# EAGLE board SONAR_4UP (EAGLE 9.5.0)
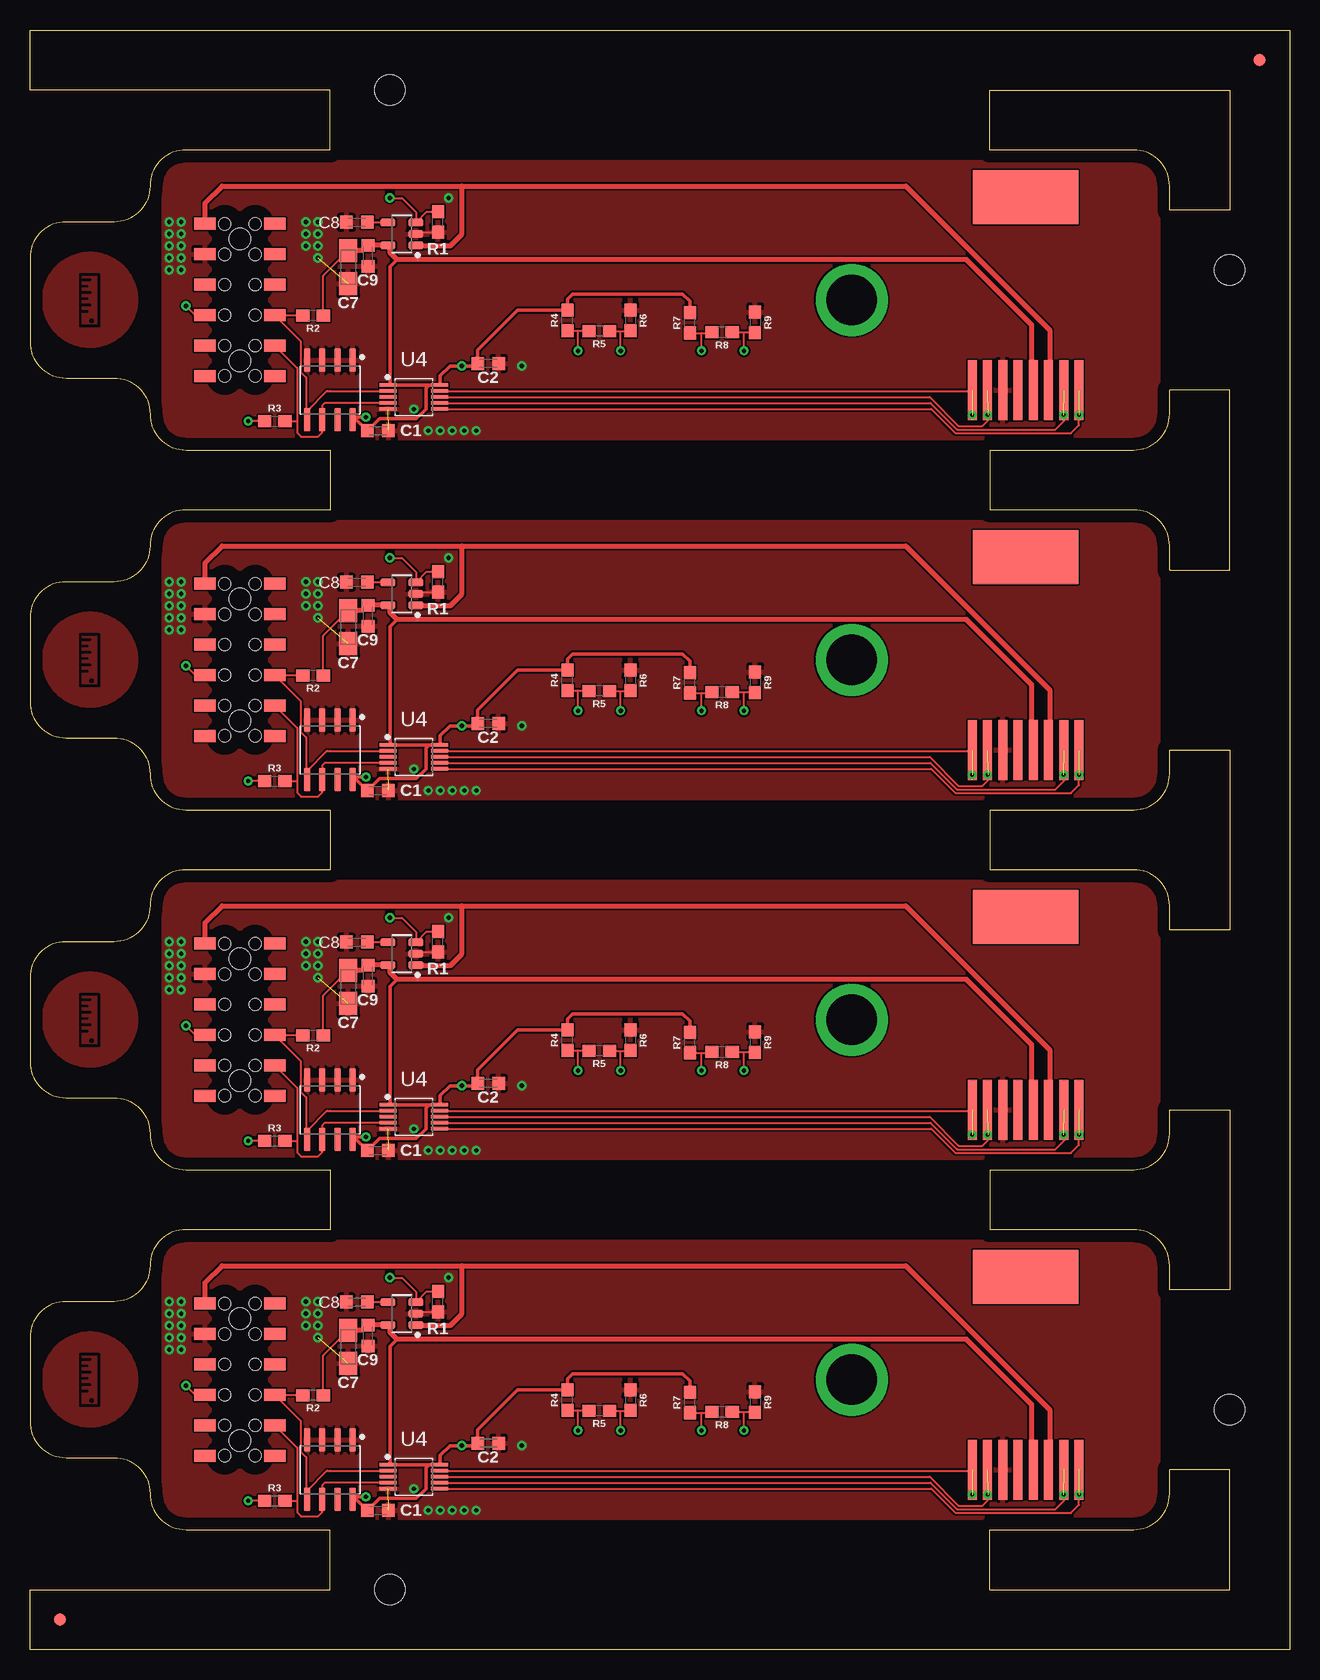
[diagram p0: board, top side]
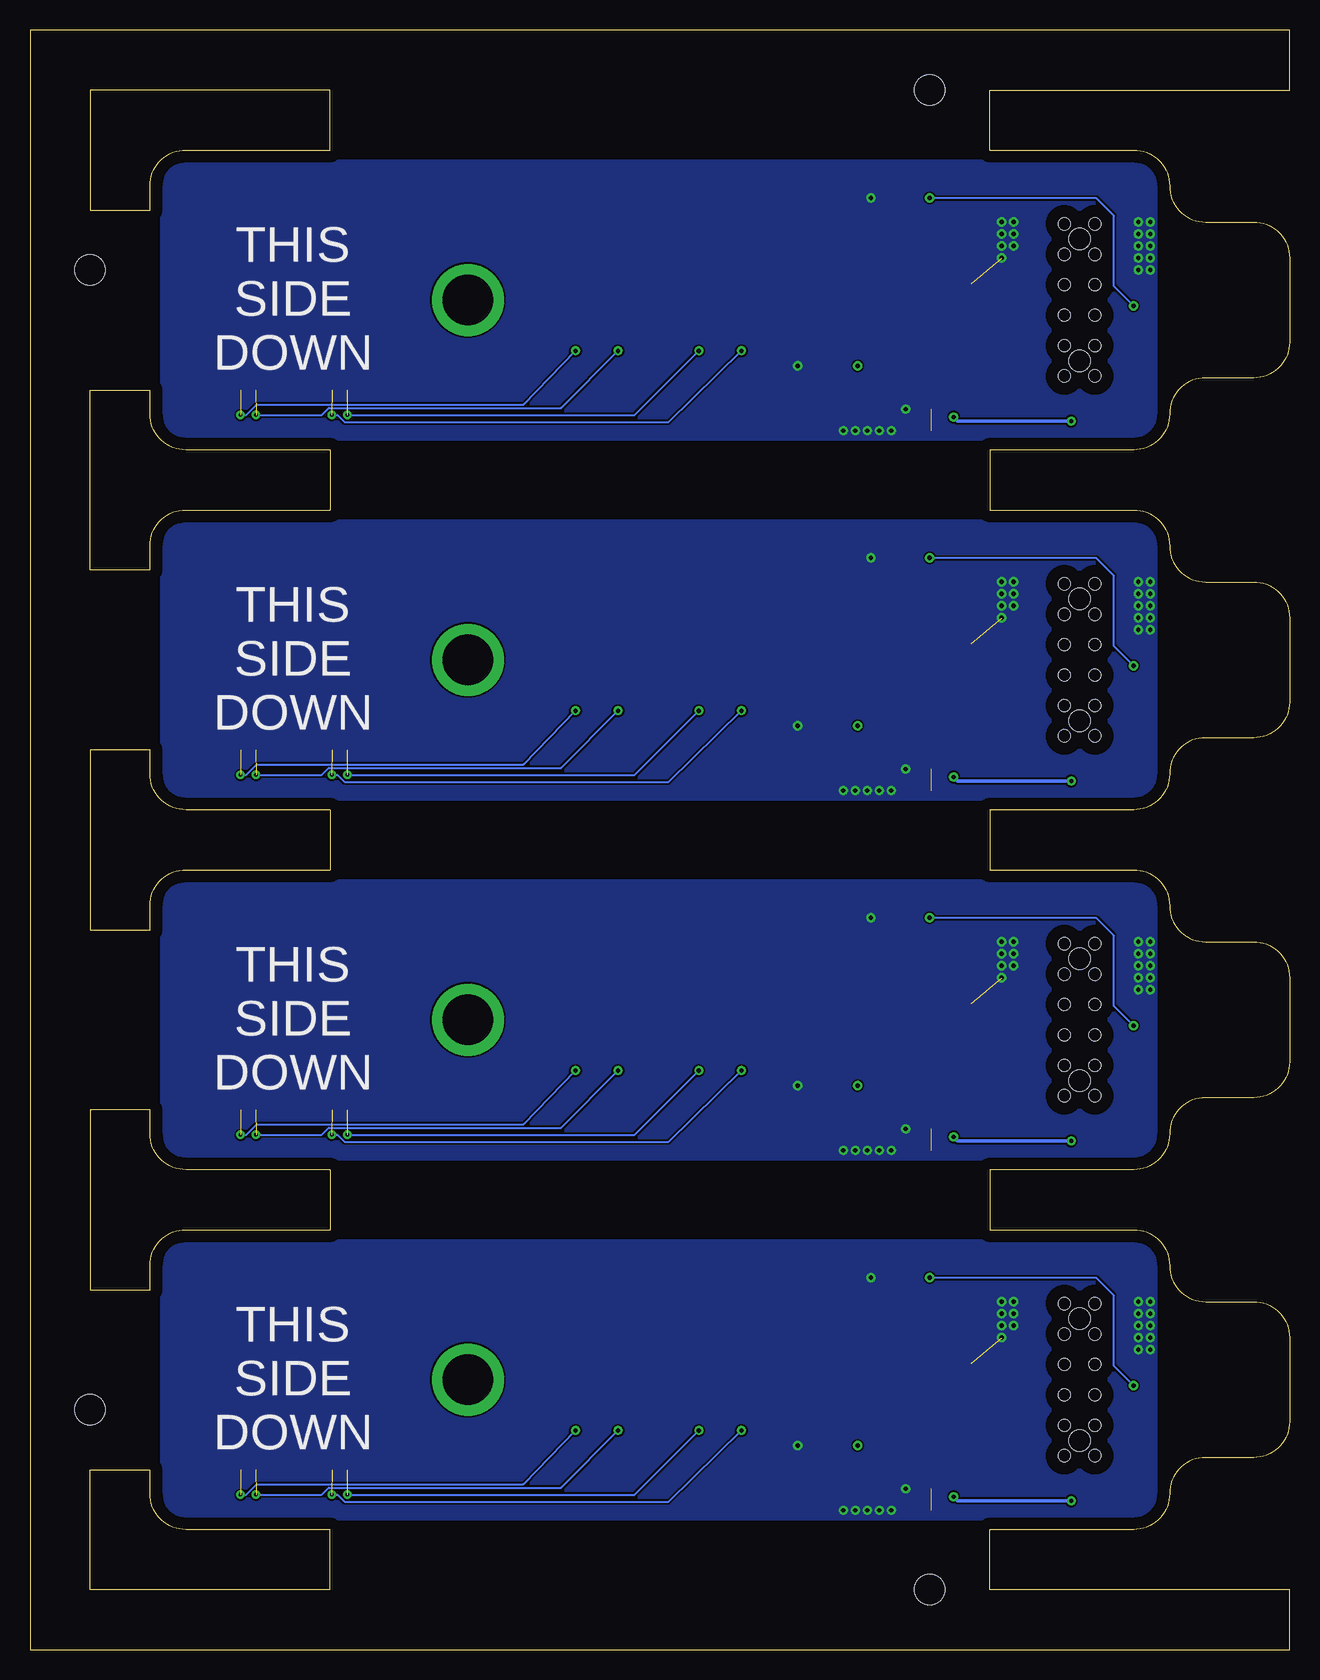
[diagram p1: board, bottom side, seen from below]

Size 105 x 135 mm. Coordinates in mm from the lower left corner, seen from the top.
Outline: 92,10 arc90 95,13 95,15 100,15 100,5 80,5 80,10 92,10
Outline: 95,32 arc90 92,35 80,35 80,40 92,40 arc90 95,43 95,45 100,45 100,30 95,30 95,32
Outline: 10,13 arc90 13,10 25,10 25,5 0,5 0,0 105,0 105,135 0,135 0,130 25,130 25,125 13,125 arc90 10,122 arc-90 7,119 3,119 arc90 0,116 0,109 arc90 3,106 7,106 arc-90 10,103 arc90 13,100 25,100 25,95 13,95 arc90 10,92 arc-90 7,89 3,89 arc90 0,86 0,79 arc90 3,76 7,76 arc-90 10,73 arc90 13,70 25,70 25,65 13,65 arc90 10,62 arc-90 7,59 3,59 arc90 0,56 0,49 arc90 3,46 7,46 arc-90 10,43 arc90 13,40 25,40 25,35 13,35 arc90 10,32 arc-90 7,29 3,29 arc90 0,26 0,19 arc90 3,16 7,16 arc-90 10,13
Outline: 95,62 arc90 92,65 80,65 80,70 92,70 arc90 95,73 95,75 100,75 100,60 95,60 95,62
Outline: 95,92 arc90 92,95 80,95 80,100 92,100 arc90 95,103 95,105 100,105 100,90 95,90 95,92
Outline: 95,122 arc90 92,125 80,125 80,130 100,130 100,120 95,120 95,122
Copper layers (1*16): Top 0.035mm / dielectric 1.5mm / Bottom 0.035mm
Design rules "default *": minimum track width 6mil, minimum drill 0.35mm, track to track 6mil, track to pad 6mil, pad to pad 6mil, via to via 6mil, smd to smd 6mil, copper to edge 40mil, drill to drill 6mil, minimum pad ring 10mil, minimum via ring 8mil, stop-mask expansion 4mil, vias tented up to drill 0.35mm, thermal gap 10mil
Holes 2.54 mm at 30,5 100,20 100,115 30,130

## Footprints (pad centres in the part's own frame; a part is rotated, then mirrored left to right if it is on the bottom)
C0603K = smd 1.05 x 1.08: 1 -0.875,0; 2 0.875,0
A/3216-18R = smd 1.95 x 1.5: + 1.375,0; - -1.375,0
FIDUCIAL_1MM = smd 1 x 1: 1 0,0
M20-7810645 = smd 1.02 x 1.78: P$1 -6.35,-2.91; P$2 -3.81,-2.91; P$3 -1.27,-2.91; P$4 1.27,-2.91; P$5 3.81,-2.91; P$6 6.35,-2.91; P$7 6.35,2.91; P$8 3.81,2.91; P$9 1.27,2.91; P$10 -1.27,2.91; P$11 -3.81,2.91; P$12 -6.35,2.91 | hole 1.02: -6.35,1.27; -3.81,1.27; -1.27,1.27; 1.27,1.27; 3.81,1.27; 6.35,1.27; 6.35,-1.27; 3.81,-1.27; 1.27,-1.27; -1.27,-1.27; -3.81,-1.27; -6.35,-1.27 | hole 1.8: -5.08,0; 5.08,0
85513-5009 = smd 0.76 x 5: 1 4.445,0; 2 3.175,0; 3 1.905,0; 4 0.635,0; 5 -0.635,0; 6 -1.905,0; 7 -3.175,0; 8 -4.445,0 | smd 8.8 x 4.5: P$1 0,16.05
0603 = smd 1.1 x 1: 1 -0.85,0; 2 0.85,0
SOIC127P600X175-8 = smd 1.968 x 0.569: 1 -2.473,1.905; 2 -2.473,0.635; 3 -2.473,-0.635; 4 -2.473,-1.905; 5 2.473,-1.905; 6 2.473,-0.635; 7 2.473,0.635; 8 2.473,1.905
SOP50P490X110-10 = smd 1.438 x 0.297: 1 -2.145,1; 2 -2.145,0.5; 3 -2.145,0; 4 -2.145,-0.5; 5 -2.145,-1; 6 2.145,-1; 7 2.145,-0.5; 8 2.145,0; 9 2.145,0.5; 10 2.145,1
SOT95P280X145-5 = smd 1.262 x 0.609: 1 -1.175,0.95; 2 -1.175,0; 3 -1.175,-0.95; 4 1.175,-0.95; 5 1.175,0.95

## Placement (x,y rotation side)
C1  .1uf  [C0603K]  29,101.6 0 top
C2  .1uf  [C0603K]  38.2,107.2 0 top
C3  6.8uf  [A/3216-18R]  26.54,85.23 90 top
C4  [C0603K]  27.25,88.97 180 top
C5  .1uf  [C0603K]  28.17,86.17 270 top
C6  .1uf  [C0603K]  29,71.6 0 top
C7  6.8uf  [A/3216-18R]  26.54,115.23 90 top
C8  [C0603K]  27.25,118.97 180 top
C9  .1uf  [C0603K]  28.17,116.17 270 top
C10  .1uf  [C0603K]  38.2,77.2 0 top
C11  6.8uf  [A/3216-18R]  26.54,55.23 90 top
C12  [C0603K]  27.25,58.97 180 top
C13  .1uf  [C0603K]  28.17,56.17 270 top
C14  .1uf  [C0603K]  29,41.6 0 top
C15  .1uf  [C0603K]  38.2,47.2 0 top
C16  6.8uf  [A/3216-18R]  26.54,25.23 90 top
C17  [C0603K]  27.25,28.97 180 top
C18  .1uf  [C0603K]  28.17,26.18 270 top
C19  .1uf  [C0603K]  29,11.6 0 top
C20  .1uf  [C0603K]  38.2,17.2 0 top
FID1  FIDUCIAL_1MM  [FIDUCIAL_1MM]  102.5,132.5 0 top
FID13  FIDUCIAL_1MM  [FIDUCIAL_1MM]  2.5,2.5 0 top
J1  2X6-HEADERS  [M20-7810645]  17.5,112.5 90 top
J2  95501-6889VERT  [85513-5009]  83,105 0 top
J3  2X6-HEADERS  [M20-7810645]  17.5,82.5 90 top
J4  95501-6889VERT  [85513-5009]  83,75 0 top
J5  2X6-HEADERS  [M20-7810645]  17.5,52.5 90 top
J6  95501-6889VERT  [85513-5009]  83,45 0 top
J7  2X6-HEADERS  [M20-7810645]  17.5,22.5 90 top
J8  95501-6889VERT  [85513-5009]  83,15 0 top
R1  100k  [0603]  34,119 90 top
R2  4.7k  [0603]  23.6,111.2 180 top
R3  4.7k  [0603]  20.4,102.4 0 top
R4  330  [0603]  44.8,110.8 90 top
R5  100  [0603]  47.46,109.89 180 top
R6  300  [0603]  50.06,110.79 270 top
R7  330  [0603]  55,110.6 90 top
R8  100  [0603]  57.69,109.79 180 top
R9  300  [0603]  60.45,110.62 270 top
R10  100k  [0603]  34,89 90 top
R11  4.7k  [0603]  23.6,81.2 180 top
R12  4.7k  [0603]  20.4,72.4 0 top
R13  330  [0603]  44.8,80.8 90 top
R14  100  [0603]  47.46,79.89 180 top
R15  300  [0603]  50.06,80.79 270 top
R16  330  [0603]  55,80.6 90 top
R17  100  [0603]  57.69,79.79 180 top
R18  300  [0603]  60.45,80.62 270 top
R19  100k  [0603]  34,59 90 top
R20  4.7k  [0603]  23.6,51.2 180 top
R21  4.7k  [0603]  20.4,42.4 0 top
R22  330  [0603]  44.8,50.8 90 top
R23  100  [0603]  47.46,49.9 180 top
R24  300  [0603]  50.06,50.79 270 top
R25  330  [0603]  55,50.6 90 top
R26  100  [0603]  57.69,49.79 180 top
R27  300  [0603]  60.45,50.62 270 top
R28  100k  [0603]  34,29 90 top
R29  4.7k  [0603]  23.6,21.2 180 top
R30  4.7k  [0603]  20.4,12.4 0 top
R31  330  [0603]  44.8,20.8 90 top
R32  100  [0603]  47.46,19.89 180 top
R33  300  [0603]  50.06,20.79 270 top
R34  330  [0603]  55,20.6 90 top
R35  100  [0603]  57.69,19.79 180 top
R36  300  [0603]  60.45,20.62 270 top
U1  M24C02-WMN6TP  [SOIC127P600X175-8]  25,75 270 top
U2  PCA9615  [SOP50P490X110-10]  32,74.4 0 top
U3  M24C02-WMN6TP  [SOIC127P600X175-8]  25,105 270 top
U4  PCA9615  [SOP50P490X110-10]  32,104.4 0 top
U5  M24C02-WMN6TP  [SOIC127P600X175-8]  25,45 270 top
U6  PCA9615  [SOP50P490X110-10]  32,44.4 0 top
U7  M24C02-WMN6TP  [SOIC127P600X175-8]  25,15 270 top
U8  PCA9615  [SOP50P490X110-10]  32,14.4 0 top
U$1  MIC5219-3.3YM5-TR  [SOT95P280X145-5]  31,88 180 top
U$2  MIC5219-3.3YM5-TR  [SOT95P280X145-5]  31,58 180 top
U$3  MIC5219-3.3YM5-TR  [SOT95P280X145-5]  31,28 180 top
U$4  MIC5219-3.3YM5-TR  [SOT95P280X145-5]  31,118 180 top

## Library data of the parts
C1-C20 = rcl; SPICEPREFIX: C
FID1 FID13 = microbuilder; BOM: EXCLUDE
J1-J8 U1-U8 U$1-U$4 = Conservify
R1-R36 = SparkFun-Resistors; PROD_ID: RES-07828

## Nets
3V1: C3.+ C5.1 C6.1 C10.1 J4.4 R11.1 R12.1 R13.2 R16.2 U1.8 U2.1 U2.10 U$1.5
3V2: C11.+ C13.1 C14.1 C15.1 J6.4 R20.1 R21.1 R22.2 R25.2 U5.8 U6.1 U6.10 U$2.5
3V3: C1.1 C2.1 C7.+ C9.1 J2.4 R2.1 R3.1 R4.2 R7.2 U3.8 U4.1 U4.10 U$4.5
3V4: C16.+ C18.1 C19.1 C20.1 J8.4 R29.1 R30.1 R31.2 R34.2 U7.8 U8.1 U8.10 U$3.5
EN: U4.3
EN1: U2.3
EN2: U6.3
EN3: U8.3
ENABLE: J1.P$10 R1.2 U$4.3
ENABLE1: J3.P$10 R10.2 U$1.3
ENABLE2: J5.P$10 R19.2 U$2.3
ENABLE3: J7.P$10 R28.2 U$3.3
G1: J1.P$11
G2: J1.P$12
G3: J3.P$11
G4: J3.P$12
G5: J5.P$11
G6: J5.P$12
G7: J7.P$11
G8: J7.P$12
GND: C1.2 C2.2 C7.- C8.2 C9.2 J1.P$8 J2.6 R1.1 R6.1 R9.1 U3.1 U3.2 U3.3 U3.4 U4.5 U$4.2
GND2: C3.- C4.2 C5.2 C6.2 C10.2 J3.P$8 J4.6 R10.1 R15.1 R18.1 U1.1 U1.2 U1.3 U1.4 U2.5 U$1.2
GND4: C11.- C12.2 C13.2 C14.2 C15.2 J5.P$8 J6.6 R19.1 R24.1 R27.1 U5.1 U5.2 U5.3 U5.4 U6.5 U$2.2
GND6: C16.- C17.2 C18.2 C19.2 C20.2 J7.P$8 J8.6 R28.1 R33.1 R36.1 U7.1 U7.2 U7.3 U7.4 U8.5 U$3.2
IN3V1: J3.P$9
IN3V2: J5.P$9
IN3V3: J1.P$9
IN3V4: J7.P$9
LCL-M: J2.1 R8.1 R9.2 U4.6
LCL-M1: J4.1 R17.1 R18.2 U2.6
LCL-M2: J6.1 R26.1 R27.2 U6.6
LCL-M3: J8.1 R35.1 R36.2 U8.6
LCL-P: J2.2 R7.1 R8.2 U4.7
LCL-P1: J4.2 R16.1 R17.2 U2.7
LCL-P2: J6.2 R25.1 R26.2 U6.7
LCL-P3: J8.2 R34.1 R35.2 U8.7
LDA-M: J2.8 R5.1 R6.2 U4.9
LDA-M1: J4.8 R14.1 R15.2 U2.9
LDA-M2: J6.8 R23.1 R24.2 U6.9
LDA-M3: J8.8 R32.1 R33.2 U8.9
LDA-P: J2.7 R4.1 R5.2 U4.8
LDA-P1: J4.7 R13.1 R14.2 U2.8
LDA-P2: J6.7 R22.1 R23.2 U6.8
LDA-P3: J8.7 R31.1 R32.2 U8.8
MISO: J1.P$4
MISO1: J3.P$4
MISO2: J5.P$4
MISO3: J7.P$4
MOSI: J1.P$5
MOSI1: J3.P$5
MOSI2: J5.P$5
MOSI3: J7.P$5
N$3: C4.1 U$1.4
N$5: C12.1 U$2.4
N$6: C8.1 U$4.4
N$8: C17.1 U$3.4
NC: J1.P$1
NC1: J3.P$1
NC2: J5.P$1
NC3: J7.P$1
SCK: J1.P$6
SCK1: J3.P$6
SCK2: J5.P$6
SCK3: J7.P$6
SCL: J1.P$2 R3.2 U3.6 U4.4
SCL1: J3.P$2 R12.2 U1.6 U2.4
SCL2: J5.P$2 R21.2 U5.6 U6.4
SCL3: J7.P$2 R30.2 U7.6 U8.4
SDA: J1.P$3 R2.2 U3.5 U4.2
SDA1: J3.P$3 R11.2 U1.5 U2.2
SDA2: J5.P$3 R20.2 U5.5 U6.2
SDA3: J7.P$3 R29.2 U7.5 U8.2
UNREG: J1.P$7 J2.3 U$4.1
UNREG1: J3.P$7 J4.3 U$1.1
UNREG2: J5.P$7 J6.3 U$2.1
UNREG3: J7.P$7 J8.3 U$3.1
WC: U3.7
WC1: U1.7
WC2: U5.7
WC3: U7.7

## Tracks (layer width: path | path; a pad name or v marks a point on that pad's centre or on a via)
3V1  (via drill 0.35)
  Top 0.152: C5.1 27.73,86.61 | C10.1 37.12,77 | 27,72.73 27.2,72.53 U1.8 | R11.1 24.45,84.52 C3.+ | R12.1 v18.2,72.4 | 33.27,75.4 U2.10 34.2,75.45 | 30,75.4 U2.1 | U$1.5 30,86.88
  Top 0.305: 27,72.73 v28,72.73 | 37.12,77 v36,77 35,77 34.2,76.2 34.2,75.45 | 27.2,72.53 C6.1 29.12,72.6 32.2,72.6 33,73.4 33,75.13 33.27,75.4 | R16.2 55,82.4 54.4,83 45.23,83 44.8,82.58 R13.2 40.65,81.65 37.33,78.33 C10.1 | U2.10 30,75.4 30,85.26 30.59,85.86
  Top 0.406: U$1.5 C5.1 | 27.73,86.61 C3.+ | 30,86.88 30,86.45 30.59,85.86 78.07,85.86 83.48,80.44 83.48,76.55 83.64,76.4 J4.4
  Bottom 0.305: v18.2,72.4 27.67,72.4 v28,72.73
3V2  (via drill 0.35)
  Top 0.152: C13.1 27.73,56.61 | C15.1 37.12,47 | 27,42.73 27.2,42.53 U5.8 | R20.1 24.45,54.52 C11.+ | R21.1 v18.2,42.4 | 33.27,45.4 U6.10 34.2,45.45 | 30,45.4 U6.1 | U$2.5 30,56.88
  Top 0.305: 27,42.73 v28,42.73 | 37.12,47 v36,47 35,47 34.2,46.2 34.2,45.45 | 27.2,42.53 C14.1 29.12,42.6 32.2,42.6 33,43.4 33,45.13 33.27,45.4 | R25.2 55,52.4 54.4,53 45.23,53 44.8,52.58 R22.2 40.65,51.65 37.33,48.33 C15.1 | U6.10 30,45.4 30,55.26 30.59,55.86
  Top 0.406: U$2.5 C13.1 | 27.73,56.61 C11.+ | 30,56.88 30,56.45 30.59,55.86 78.07,55.86 83.48,50.44 83.48,46.55 83.64,46.4 J6.4
  Bottom 0.305: v18.2,42.4 27.67,42.4 v28,42.73
3V3  (via drill 0.35)
  Top 0.152: C9.1 27.73,116.61 | C2.1 37.12,107 | 27,102.73 27.2,102.53 U3.8 | R2.1 24.45,114.52 C7.+ | R3.1 v18.2,102.4 | 33.27,105.4 U4.10 34.2,105.45 | 30,105.4 U4.1 | U$4.5 30,116.88
  Top 0.305: 27,102.73 v28,102.73 | 37.12,107 v36,107 35,107 34.2,106.2 34.2,105.45 | 27.2,102.53 C1.1 29.12,102.6 32.2,102.6 33,103.4 33,105.13 33.27,105.4 | R7.2 55,112.4 54.4,113 45.23,113 44.8,112.58 R4.2 40.65,111.65 37.33,108.33 C2.1 | U4.10 30,105.4 30,115.26 30.59,115.86
  Top 0.406: U$4.5 C9.1 | 27.73,116.61 C7.+ | 30,116.88 30,116.45 30.59,115.86 78.07,115.86 83.48,110.44 83.48,106.55 83.64,106.4 J2.4
  Bottom 0.305: v18.2,102.4 27.67,102.4 v28,102.73
3V4  (via drill 0.35)
  Top 0.152: C18.1 27.73,26.61 | C20.1 37.12,17 | 27,12.73 27.2,12.53 U7.8 | R29.1 24.45,24.52 C16.+ | R30.1 v18.2,12.4 | 33.27,15.4 U8.10 34.2,15.46 | 30,15.4 U8.1 | U$3.5 30,26.88
  Top 0.305: 27,12.73 v28,12.73 | 37.12,17 v36,17 35,17 34.2,16.2 34.2,15.46 | 27.2,12.53 C19.1 29.12,12.6 32.2,12.6 33,13.4 33,15.13 33.27,15.4 | R34.2 55,22.4 54.4,23 45.23,23 44.8,22.57 R31.2 40.65,21.65 37.33,18.32 C20.1 | U8.10 30,15.4 30,25.26 30.59,25.86
  Top 0.406: U$3.5 C18.1 | 27.73,26.61 C16.+ | 30,26.88 30,26.45 30.59,25.86 78.07,25.86 83.48,20.44 83.48,16.55 83.64,16.4 J8.4
  Bottom 0.305: v18.2,12.4 27.67,12.4 v28,12.73
ENABLE  (via drill 0.35)
  Top 0.152: R1.2 33.08,119.85 U$4.3 32.17,119.83 31,121 v30,121 | J1.P$10 13.77,111.23 v13,112
  Bottom 0.152: v13,112 14.63,113.63 14.63,119.51 16.11,121 v30,121
ENABLE1  (via drill 0.35)
  Top 0.152: R10.2 33.08,89.85 U$1.3 32.17,89.83 31,91 v30,91 | J3.P$10 13.77,81.23 v13,82
  Bottom 0.152: v13,82 14.63,83.63 14.63,89.51 16.11,91 v30,91
ENABLE2  (via drill 0.35)
  Top 0.152: R19.2 33.08,59.85 U$2.3 32.17,59.83 31,61 v30,61 | J5.P$10 13.77,51.23 v13,52
  Bottom 0.152: v13,52 14.63,53.63 14.63,59.51 16.11,61 v30,61
ENABLE3  (via drill 0.35)
  Top 0.152: R28.2 33.08,29.85 U$3.3 32.17,29.82 31,31 v30,31 | J7.P$10 13.77,21.23 v13,22
  Bottom 0.152: v13,22 14.63,23.63 14.63,29.51 16.11,31 v30,31
GND  (via drill 0.35)  (2 unrouted)
  Top 0.152: U$4.2 32.33,118.15 R1.1
  other vias: 23,119 24,119 24,118 23,118 24,117 23,117 24,116 11.6,119 11.6,118 11.6,117 11.6,116 11.6,115 12.6,119 12.6,118 12.6,117 12.6,116 12.6,115 32,103.4 34.9,121 37.2,101.6 33.2,101.6 34.2,101.6 35.2,101.6 36.2,101.6 41,107
  pour Top: 11.2,124 94,124 94,101 11.2,101
  pour Bottom: 11.2,124 94,124 94,101 11.2,101
GND1
  pour Top (rank 3): 5.37,110.76 5.37,110.72 5.36,110.69 5.35,110.65 5.33,110.62 5.31,110.59 5.29,110.58 5.27,110.56 5.24,110.55 5.22,110.54 5.2,110.53 5.18,110.53 5.14,110.52 5.14,110.47 5.49,110.47 5.49,110.76
  pour Top (rank 3): 5.13,110.52 5.1,110.53 5.08,110.53 5.04,110.55 5.01,110.56 4.99,110.58 4.97,110.59 4.95,110.63 4.92,110.67 4.91,110.7 4.91,110.72 4.91,110.76 4.9,110.76 4.33,110.76 4.33,110.76 4.33,110.47 4.33,110.47 5.14,110.47 5.14,110.52
  pour Top (rank 3): 4.91,110.77 4.91,110.82 4.92,110.84 4.93,110.86 4.94,110.88 4.95,110.9 4.97,110.91 4.98,110.93 5,110.95 5.02,110.96 5.04,110.97 5.07,110.98 5.11,110.99 5.13,110.99 5.15,110.99 5.2,110.98 5.23,110.97 5.25,110.96 5.27,110.95 5.31,110.92 5.33,110.9 5.34,110.88 5.36,110.85 5.36,110.83 5.37,110.81 5.38,110.76 5.49,110.76 5.49,114.47 5.49,114.47 4.33,114.47 4.33,114.32 5.02,114.32 5.04,114.32 5.06,114.31 5.08,114.3 5.1,114.28 5.11,114.27 5.13,114.24 5.14,114.22 5.14,114.2 5.14,114.17 5.14,114.15 5.13,114.12 5.12,114.1 5.1,114.08 5.08,114.06 5.05,114.05 5.03,114.04 5.01,114.04 4.32,114.04 4.32,114.04 4.32,113.79 4.76,113.79 4.79,113.79 4.82,113.78 4.83,113.77 4.85,113.76 4.87,113.74 4.88,113.72 4.89,113.7 4.9,113.67 4.9,113.65 4.9,113.63 4.89,113.61 4.88,113.58 4.87,113.56 4.86,113.55 4.83,113.53 4.81,113.52 4.79,113.51 4.76,113.51 4.33,113.51 4.33,113.26 5.02,113.26 5.03,113.26 5.06,113.26 5.08,113.25 5.1,113.24 5.11,113.22 5.12,113.21 5.14,113.19 5.15,113.17 5.15,113.15 5.15,113.12 5.15,113.09 5.15,113.07 5.13,113.04 5.11,113.02 5.09,113.01 5.06,112.99 5.04,112.98 5.02,112.98 4.33,112.98 4.33,112.98 4.33,112.74 4.76,112.74 4.79,112.74 4.81,112.73 4.83,112.72 4.85,112.71 4.87,112.69 4.88,112.67 4.89,112.65 4.9,112.63 4.9,112.61 4.9,112.58 4.89,112.56 4.88,112.53 4.87,112.52 4.86,112.5 4.83,112.48 4.81,112.47 4.79,112.47 4.76,112.46 4.33,112.46 4.33,112.21 5.02,112.21 5.03,112.21 5.05,112.21 5.07,112.2 5.09,112.19 5.11,112.18 5.12,112.16 5.13,112.15 5.14,112.12 5.15,112.11 5.15,112.09 5.15,112.07 5.15,112.04 5.15,112.02 5.13,111.99 5.11,111.97 5.09,111.96 5.06,111.94 5.04,111.93 5.02,111.93 4.33,111.93 4.33,111.93 4.33,111.68 4.75,111.68 4.78,111.68 4.8,111.68 4.83,111.67 4.85,111.66 4.87,111.65 4.88,111.63 4.9,111.61 4.91,111.59 4.91,111.56 4.91,111.55 4.91,111.52 4.91,111.5 4.9,111.47 4.89,111.46 4.87,111.44 4.85,111.42 4.83,111.41 4.81,111.41 4.78,111.4 4.33,111.4 4.33,110.76 4.91,110.76
  pour Top (rank 3): 5.49,114.47 5.49,110.76 5.61,110.76 5.61,114.47
  pour Top (rank 3): 4.18,110.18 4.16,110.19 4.13,110.19 4.11,110.2 4.09,110.22 4.07,110.25 4.05,110.27 4.05,110.3 4.04,110.32 4.05,114.62 4.05,114.64 4.05,114.66 4.06,114.68 4.08,114.7 4.09,114.71 4.11,114.73 4.13,114.74 4.15,114.75 4.18,114.75 5.49,114.75 5.49,114.75 5.49,116.48 5.42,116.49 5.21,116.51 5.01,116.51 4.8,116.51 4.6,116.49 4.4,116.47 4.2,116.43 4,116.39 3.81,116.33 3.63,116.27 3.45,116.2 3.27,116.12 3.1,116.03 2.93,115.93 2.77,115.83 2.61,115.72 2.46,115.6 2.31,115.47 2.17,115.34 2.04,115.2 1.92,115.06 1.8,114.9 1.68,114.75 1.58,114.58 1.48,114.42 1.39,114.24 1.31,114.07 1.24,113.88 1.18,113.7 1.13,113.51 1.08,113.31 1.05,113.12 1.02,112.92 1.01,112.71 1,112.51 1.01,112.3 1.02,112.1 1.05,111.9 1.08,111.7 1.13,111.5 1.18,111.32 1.24,111.13 1.31,110.95 1.39,110.77 1.48,110.6 1.58,110.43 1.68,110.27 1.8,110.11 1.91,109.96 2.04,109.81 2.17,109.67 2.31,109.54 2.46,109.41 2.61,109.3 2.77,109.18 2.93,109.08 3.1,108.98 3.27,108.9 3.45,108.82 3.63,108.74 3.82,108.68 4,108.63 4.2,108.58 4.4,108.55 4.6,108.52 4.8,108.51 5.01,108.5 5.21,108.51 5.42,108.52 5.49,108.53 5.49,110.18
  pour Top (rank 3): 9.01,112.71 8.99,112.92 8.97,113.12 8.93,113.32 8.89,113.51 8.83,113.7 8.77,113.88 8.7,114.07 8.62,114.24 8.53,114.42 8.43,114.59 8.33,114.75 8.22,114.9 8.1,115.05 7.97,115.2 7.84,115.34 7.7,115.47 7.55,115.6 7.4,115.72 7.25,115.83 7.08,115.93 6.92,116.03 6.74,116.12 6.57,116.2 6.38,116.27 6.2,116.33 6.01,116.39 5.81,116.43 5.62,116.47 5.49,116.48 5.49,114.75 5.76,114.75 5.78,114.75 5.8,114.74 5.82,114.73 5.83,114.72 5.85,114.71 5.86,114.69 5.87,114.68 5.88,114.66 5.89,114.64 5.89,114.62 5.89,110.31 5.89,110.29 5.88,110.27 5.87,110.25 5.86,110.23 5.85,110.22 5.83,110.21 5.81,110.2 5.79,110.19 5.77,110.18 5.76,110.18 5.49,110.18 5.49,110.18 5.49,108.53 5.62,108.55 5.81,108.58 6.01,108.63 6.2,108.68 6.38,108.74 6.57,108.81 6.74,108.9 6.92,108.98 7.08,109.08 7.25,109.18 7.4,109.3 7.56,109.42 7.7,109.54 7.84,109.67 7.97,109.81 8.1,109.96 8.22,110.11 8.33,110.27 8.43,110.43 8.53,110.6 8.62,110.77 8.7,110.95 8.77,111.13 8.83,111.31 8.89,111.5 8.93,111.7 8.97,111.9 8.99,112.1 9.01,112.3 9.01,112.51
  pour Top (rank 3): 5.49,110.76 5.49,110.47 5.61,110.47 5.61,110.76
GND2  (via drill 0.35)  (2 unrouted)
  Top 0.152: U$1.2 32.33,88.15 R10.1
  other vias: 23,89 24,89 24,88 23,88 24,87 23,87 24,86 11.6,89 11.6,88 11.6,87 11.6,86 11.6,85 12.6,89 12.6,88 12.6,87 12.6,86 12.6,85 32,73.4 34.9,91 37.2,71.6 33.2,71.6 34.2,71.6 35.2,71.6 36.2,71.6 41,77
  pour Top: 11.2,94 94,94 94,71 11.2,71
  pour Bottom: 11.2,94 94,94 94,71 11.2,71
GND3
  pour Top (rank 3): 5.37,80.76 5.37,80.72 5.36,80.69 5.35,80.65 5.33,80.62 5.31,80.59 5.29,80.58 5.27,80.56 5.24,80.55 5.22,80.54 5.2,80.53 5.18,80.53 5.14,80.52 5.14,80.47 5.49,80.47 5.49,80.76
  pour Top (rank 3): 5.13,80.52 5.1,80.53 5.08,80.53 5.04,80.55 5.01,80.56 4.99,80.58 4.97,80.59 4.95,80.63 4.92,80.67 4.91,80.7 4.91,80.72 4.91,80.76 4.9,80.76 4.33,80.76 4.33,80.76 4.33,80.47 4.33,80.47 5.14,80.47 5.14,80.52
  pour Top (rank 3): 4.91,80.77 4.91,80.82 4.92,80.84 4.93,80.86 4.94,80.88 4.95,80.9 4.97,80.91 4.98,80.93 5,80.95 5.02,80.96 5.04,80.97 5.07,80.98 5.11,80.99 5.13,80.99 5.15,80.99 5.2,80.98 5.23,80.97 5.25,80.96 5.27,80.95 5.31,80.92 5.33,80.9 5.34,80.88 5.36,80.85 5.36,80.83 5.37,80.81 5.38,80.76 5.49,80.76 5.49,84.47 5.49,84.47 4.33,84.47 4.33,84.32 5.02,84.32 5.04,84.32 5.06,84.31 5.08,84.3 5.1,84.28 5.11,84.27 5.13,84.24 5.14,84.22 5.14,84.2 5.14,84.17 5.14,84.15 5.13,84.12 5.12,84.1 5.1,84.08 5.08,84.06 5.05,84.05 5.03,84.04 5.01,84.04 4.32,84.04 4.32,84.04 4.32,83.79 4.76,83.79 4.79,83.79 4.82,83.78 4.83,83.77 4.85,83.76 4.87,83.74 4.88,83.72 4.89,83.7 4.9,83.67 4.9,83.65 4.9,83.63 4.89,83.61 4.88,83.58 4.87,83.56 4.86,83.55 4.83,83.53 4.81,83.52 4.79,83.51 4.76,83.51 4.33,83.51 4.33,83.26 5.02,83.26 5.03,83.26 5.06,83.26 5.08,83.25 5.1,83.24 5.11,83.22 5.12,83.21 5.14,83.19 5.15,83.17 5.15,83.15 5.15,83.12 5.15,83.09 5.15,83.07 5.13,83.04 5.11,83.02 5.09,83.01 5.06,82.99 5.04,82.98 5.02,82.98 4.33,82.98 4.33,82.98 4.33,82.74 4.76,82.74 4.79,82.74 4.81,82.73 4.83,82.72 4.85,82.71 4.87,82.69 4.88,82.67 4.89,82.65 4.9,82.63 4.9,82.61 4.9,82.58 4.89,82.56 4.88,82.53 4.87,82.52 4.86,82.5 4.83,82.48 4.81,82.47 4.79,82.47 4.76,82.46 4.33,82.46 4.33,82.21 5.02,82.21 5.03,82.21 5.05,82.21 5.07,82.2 5.09,82.19 5.11,82.18 5.12,82.16 5.13,82.15 5.14,82.12 5.15,82.11 5.15,82.09 5.15,82.07 5.15,82.04 5.15,82.02 5.13,81.99 5.11,81.97 5.09,81.96 5.06,81.94 5.04,81.93 5.02,81.93 4.33,81.93 4.33,81.93 4.33,81.68 4.75,81.68 4.78,81.68 4.8,81.68 4.83,81.67 4.85,81.66 4.87,81.65 4.88,81.63 4.9,81.61 4.91,81.59 4.91,81.56 4.91,81.55 4.91,81.52 4.91,81.5 4.9,81.47 4.89,81.46 4.87,81.44 4.85,81.42 4.83,81.41 4.81,81.41 4.78,81.4 4.33,81.4 4.33,80.76 4.91,80.76
  pour Top (rank 3): 5.49,84.47 5.49,80.76 5.61,80.76 5.61,84.47
  pour Top (rank 3): 4.18,80.18 4.16,80.19 4.13,80.19 4.11,80.2 4.09,80.22 4.07,80.25 4.05,80.27 4.05,80.3 4.04,80.32 4.05,84.62 4.05,84.64 4.05,84.66 4.06,84.68 4.08,84.7 4.09,84.71 4.11,84.73 4.13,84.74 4.15,84.75 4.18,84.75 5.49,84.75 5.49,84.75 5.49,86.48 5.42,86.49 5.21,86.51 5.01,86.51 4.8,86.51 4.6,86.49 4.4,86.47 4.2,86.43 4,86.39 3.81,86.33 3.63,86.27 3.45,86.2 3.27,86.12 3.1,86.03 2.93,85.93 2.77,85.83 2.61,85.72 2.46,85.6 2.31,85.47 2.17,85.34 2.04,85.2 1.92,85.06 1.8,84.9 1.68,84.75 1.58,84.58 1.48,84.42 1.39,84.24 1.31,84.07 1.24,83.88 1.18,83.7 1.13,83.51 1.08,83.31 1.05,83.12 1.02,82.92 1.01,82.71 1,82.51 1.01,82.3 1.02,82.1 1.05,81.9 1.08,81.7 1.13,81.5 1.18,81.32 1.24,81.13 1.31,80.95 1.39,80.77 1.48,80.6 1.58,80.43 1.68,80.27 1.8,80.11 1.91,79.96 2.04,79.81 2.17,79.67 2.31,79.54 2.46,79.41 2.61,79.3 2.77,79.18 2.93,79.08 3.1,78.98 3.27,78.9 3.45,78.82 3.63,78.74 3.82,78.68 4,78.63 4.2,78.58 4.4,78.55 4.6,78.52 4.8,78.51 5.01,78.5 5.21,78.51 5.42,78.52 5.49,78.53 5.49,80.18
  pour Top (rank 3): 9.01,82.71 8.99,82.92 8.97,83.12 8.93,83.32 8.89,83.51 8.83,83.7 8.77,83.88 8.7,84.07 8.62,84.24 8.53,84.42 8.43,84.59 8.33,84.75 8.22,84.9 8.1,85.05 7.97,85.2 7.84,85.34 7.7,85.47 7.55,85.6 7.4,85.72 7.25,85.83 7.08,85.93 6.92,86.03 6.74,86.12 6.57,86.2 6.38,86.27 6.2,86.33 6.01,86.39 5.81,86.43 5.62,86.47 5.49,86.48 5.49,84.75 5.76,84.75 5.78,84.75 5.8,84.74 5.82,84.73 5.83,84.72 5.85,84.71 5.86,84.69 5.87,84.68 5.88,84.66 5.89,84.64 5.89,84.62 5.89,80.31 5.89,80.29 5.88,80.27 5.87,80.25 5.86,80.23 5.85,80.22 5.83,80.21 5.81,80.2 5.79,80.19 5.77,80.18 5.76,80.18 5.49,80.18 5.49,80.18 5.49,78.53 5.62,78.55 5.81,78.58 6.01,78.63 6.2,78.68 6.38,78.74 6.57,78.81 6.74,78.9 6.92,78.98 7.08,79.08 7.25,79.18 7.4,79.3 7.56,79.42 7.7,79.54 7.84,79.67 7.97,79.81 8.1,79.96 8.22,80.11 8.33,80.27 8.43,80.43 8.53,80.6 8.62,80.77 8.7,80.95 8.77,81.13 8.83,81.31 8.89,81.5 8.93,81.7 8.97,81.9 8.99,82.1 9.01,82.3 9.01,82.51
  pour Top (rank 3): 5.49,80.76 5.49,80.47 5.61,80.47 5.61,80.76
GND4  (via drill 0.35)  (2 unrouted)
  Top 0.152: U$2.2 32.33,58.15 R19.1
  other vias: 23,59 24,59 24,58 23,58 24,57 23,57 24,56 11.6,59 11.6,58 11.6,57 11.6,56 11.6,55 12.6,59 12.6,58 12.6,57 12.6,56 12.6,55 32,43.4 34.9,61 37.2,41.6 33.2,41.6 34.2,41.6 35.2,41.6 36.2,41.6 41,47
  pour Top: 11.2,64 94,64 94,41 11.2,41
  pour Bottom: 11.2,64 94,64 94,41 11.2,41
GND5
  pour Top (rank 3): 5.37,50.76 5.37,50.72 5.36,50.69 5.35,50.65 5.33,50.62 5.31,50.59 5.29,50.58 5.27,50.56 5.24,50.55 5.22,50.54 5.2,50.53 5.18,50.53 5.14,50.52 5.14,50.47 5.49,50.47 5.49,50.76
  pour Top (rank 3): 5.13,50.52 5.1,50.53 5.08,50.53 5.04,50.55 5.01,50.56 4.99,50.58 4.97,50.59 4.95,50.63 4.92,50.67 4.91,50.7 4.91,50.72 4.91,50.76 4.9,50.76 4.33,50.76 4.33,50.76 4.33,50.47 4.33,50.47 5.14,50.47 5.14,50.52
  pour Top (rank 3): 4.91,50.77 4.91,50.82 4.92,50.84 4.93,50.86 4.94,50.88 4.95,50.9 4.97,50.91 4.98,50.93 5,50.95 5.02,50.96 5.04,50.97 5.07,50.98 5.11,50.99 5.13,50.99 5.15,50.99 5.2,50.98 5.23,50.97 5.25,50.96 5.27,50.95 5.31,50.92 5.33,50.9 5.34,50.88 5.36,50.85 5.36,50.83 5.37,50.81 5.38,50.76 5.49,50.76 5.49,54.47 5.49,54.47 4.33,54.47 4.33,54.32 5.02,54.32 5.04,54.32 5.06,54.31 5.08,54.3 5.1,54.28 5.11,54.27 5.13,54.24 5.14,54.22 5.14,54.2 5.14,54.17 5.14,54.15 5.13,54.12 5.12,54.1 5.1,54.08 5.08,54.06 5.05,54.05 5.03,54.04 5.01,54.04 4.32,54.04 4.32,54.04 4.32,53.79 4.76,53.79 4.79,53.79 4.82,53.78 4.83,53.77 4.85,53.76 4.87,53.74 4.88,53.72 4.89,53.7 4.9,53.67 4.9,53.65 4.9,53.63 4.89,53.61 4.88,53.58 4.87,53.56 4.86,53.55 4.83,53.53 4.81,53.52 4.79,53.51 4.76,53.51 4.33,53.51 4.33,53.26 5.02,53.26 5.03,53.26 5.06,53.26 5.08,53.25 5.1,53.24 5.11,53.22 5.12,53.21 5.14,53.19 5.15,53.17 5.15,53.15 5.15,53.12 5.15,53.09 5.15,53.07 5.13,53.04 5.11,53.02 5.09,53.01 5.06,52.99 5.04,52.98 5.02,52.98 4.33,52.98 4.33,52.98 4.33,52.74 4.76,52.74 4.79,52.74 4.81,52.73 4.83,52.72 4.85,52.71 4.87,52.69 4.88,52.67 4.89,52.65 4.9,52.63 4.9,52.61 4.9,52.58 4.89,52.56 4.88,52.53 4.87,52.52 4.86,52.5 4.83,52.48 4.81,52.47 4.79,52.47 4.76,52.46 4.33,52.46 4.33,52.21 5.02,52.21 5.03,52.21 5.05,52.21 5.07,52.2 5.09,52.19 5.11,52.18 5.12,52.16 5.13,52.15 5.14,52.12 5.15,52.11 5.15,52.09 5.15,52.07 5.15,52.04 5.15,52.02 5.13,51.99 5.11,51.97 5.09,51.96 5.06,51.94 5.04,51.93 5.02,51.93 4.33,51.93 4.33,51.93 4.33,51.68 4.75,51.68 4.78,51.68 4.8,51.68 4.83,51.67 4.85,51.66 4.87,51.65 4.88,51.63 4.9,51.61 4.91,51.59 4.91,51.56 4.91,51.55 4.91,51.52 4.91,51.5 4.9,51.47 4.89,51.46 4.87,51.44 4.85,51.42 4.83,51.41 4.81,51.41 4.78,51.4 4.33,51.4 4.33,50.76 4.91,50.76
  pour Top (rank 3): 5.49,54.47 5.49,50.76 5.61,50.76 5.61,54.47
  pour Top (rank 3): 4.18,50.18 4.16,50.19 4.13,50.19 4.11,50.2 4.09,50.22 4.07,50.25 4.05,50.27 4.05,50.3 4.04,50.32 4.05,54.62 4.05,54.64 4.05,54.66 4.06,54.68 4.08,54.7 4.09,54.71 4.11,54.73 4.13,54.74 4.15,54.75 4.18,54.75 5.49,54.75 5.49,54.75 5.49,56.48 5.42,56.49 5.21,56.51 5.01,56.51 4.8,56.51 4.6,56.49 4.4,56.47 4.2,56.43 4,56.39 3.81,56.33 3.63,56.27 3.45,56.2 3.27,56.12 3.1,56.03 2.93,55.93 2.77,55.83 2.61,55.72 2.46,55.6 2.31,55.47 2.17,55.34 2.04,55.2 1.92,55.06 1.8,54.9 1.68,54.75 1.58,54.58 1.48,54.42 1.39,54.24 1.31,54.07 1.24,53.88 1.18,53.7 1.13,53.51 1.08,53.31 1.05,53.12 1.02,52.92 1.01,52.71 1,52.51 1.01,52.3 1.02,52.1 1.05,51.9 1.08,51.7 1.13,51.5 1.18,51.32 1.24,51.13 1.31,50.95 1.39,50.77 1.48,50.6 1.58,50.43 1.68,50.27 1.8,50.11 1.91,49.96 2.04,49.81 2.17,49.67 2.31,49.54 2.46,49.41 2.61,49.3 2.77,49.18 2.93,49.08 3.1,48.98 3.27,48.9 3.45,48.82 3.63,48.74 3.82,48.68 4,48.63 4.2,48.58 4.4,48.55 4.6,48.52 4.8,48.51 5.01,48.5 5.21,48.51 5.42,48.52 5.49,48.53 5.49,50.18
  pour Top (rank 3): 9.01,52.71 8.99,52.92 8.97,53.12 8.93,53.32 8.89,53.51 8.83,53.7 8.77,53.88 8.7,54.07 8.62,54.24 8.53,54.42 8.43,54.59 8.33,54.75 8.22,54.9 8.1,55.05 7.97,55.2 7.84,55.34 7.7,55.47 7.55,55.6 7.4,55.72 7.25,55.83 7.08,55.93 6.92,56.03 6.74,56.12 6.57,56.2 6.38,56.27 6.2,56.33 6.01,56.39 5.81,56.43 5.62,56.47 5.49,56.48 5.49,54.75 5.76,54.75 5.78,54.75 5.8,54.74 5.82,54.73 5.83,54.72 5.85,54.71 5.86,54.69 5.87,54.68 5.88,54.66 5.89,54.64 5.89,54.62 5.89,50.31 5.89,50.29 5.88,50.27 5.87,50.25 5.86,50.23 5.85,50.22 5.83,50.21 5.81,50.2 5.79,50.19 5.77,50.18 5.76,50.18 5.49,50.18 5.49,50.18 5.49,48.53 5.62,48.55 5.81,48.58 6.01,48.63 6.2,48.68 6.38,48.74 6.57,48.81 6.74,48.9 6.92,48.98 7.08,49.08 7.25,49.18 7.4,49.3 7.56,49.42 7.7,49.54 7.84,49.67 7.97,49.81 8.1,49.96 8.22,50.11 8.33,50.27 8.43,50.43 8.53,50.6 8.62,50.77 8.7,50.95 8.77,51.13 8.83,51.31 8.89,51.5 8.93,51.7 8.97,51.9 8.99,52.1 9.01,52.3 9.01,52.51
  pour Top (rank 3): 5.49,50.76 5.49,50.47 5.61,50.47 5.61,50.76
GND6  (via drill 0.35)  (2 unrouted)
  Top 0.152: U$3.2 32.33,28.15 R28.1
  other vias: 23,29 24,29 24,28 23,28 24,27 23,27 24,26 11.6,29 11.6,28 11.6,27 11.6,26 11.6,25 12.6,29 12.6,28 12.6,27 12.6,26 12.6,25 32,13.4 34.9,31 37.2,11.6 33.2,11.6 34.2,11.6 35.2,11.6 36.2,11.6 41,17
  pour Top: 11.2,34 94,34 94,11 11.2,11
  pour Bottom: 11.2,34 94,34 94,11 11.2,11
GND7
  pour Top (rank 3): 5.37,20.76 5.37,20.72 5.36,20.69 5.35,20.65 5.33,20.62 5.31,20.59 5.29,20.58 5.27,20.56 5.24,20.55 5.22,20.54 5.2,20.53 5.18,20.53 5.14,20.52 5.14,20.47 5.49,20.47 5.49,20.76
  pour Top (rank 3): 5.13,20.52 5.1,20.53 5.08,20.53 5.04,20.55 5.01,20.56 4.99,20.58 4.97,20.59 4.95,20.63 4.92,20.67 4.91,20.7 4.91,20.72 4.91,20.76 4.9,20.76 4.33,20.76 4.33,20.76 4.33,20.47 4.33,20.47 5.14,20.47 5.14,20.52
  pour Top (rank 3): 4.91,20.77 4.91,20.82 4.92,20.84 4.93,20.86 4.94,20.88 4.95,20.9 4.97,20.91 4.98,20.93 5,20.95 5.02,20.96 5.04,20.97 5.07,20.98 5.11,20.99 5.13,20.99 5.15,20.99 5.2,20.98 5.23,20.97 5.25,20.96 5.27,20.95 5.31,20.92 5.33,20.9 5.34,20.88 5.36,20.85 5.36,20.83 5.37,20.81 5.38,20.76 5.49,20.76 5.49,24.47 5.49,24.47 4.33,24.47 4.33,24.32 5.02,24.32 5.04,24.32 5.06,24.31 5.08,24.3 5.1,24.28 5.11,24.27 5.13,24.24 5.14,24.22 5.14,24.2 5.14,24.17 5.14,24.15 5.13,24.12 5.12,24.1 5.1,24.08 5.08,24.06 5.05,24.05 5.03,24.04 5.01,24.04 4.32,24.04 4.32,24.04 4.32,23.79 4.76,23.79 4.79,23.79 4.82,23.78 4.83,23.77 4.85,23.76 4.87,23.74 4.88,23.72 4.89,23.7 4.9,23.67 4.9,23.65 4.9,23.63 4.89,23.61 4.88,23.58 4.87,23.56 4.86,23.55 4.83,23.53 4.81,23.52 4.79,23.51 4.76,23.51 4.33,23.51 4.33,23.26 5.02,23.26 5.03,23.26 5.06,23.26 5.08,23.25 5.1,23.24 5.11,23.22 5.12,23.21 5.14,23.19 5.15,23.17 5.15,23.15 5.15,23.12 5.15,23.09 5.15,23.07 5.13,23.04 5.11,23.02 5.09,23.01 5.06,22.99 5.04,22.98 5.02,22.98 4.33,22.98 4.33,22.98 4.33,22.74 4.76,22.74 4.79,22.74 4.81,22.73 4.83,22.72 4.85,22.71 4.87,22.69 4.88,22.67 4.89,22.65 4.9,22.63 4.9,22.61 4.9,22.58 4.89,22.56 4.88,22.53 4.87,22.52 4.86,22.5 4.83,22.48 4.81,22.47 4.79,22.47 4.76,22.46 4.33,22.46 4.33,22.21 5.02,22.21 5.03,22.21 5.05,22.21 5.07,22.2 5.09,22.19 5.11,22.18 5.12,22.16 5.13,22.15 5.14,22.12 5.15,22.11 5.15,22.09 5.15,22.07 5.15,22.04 5.15,22.02 5.13,21.99 5.11,21.97 5.09,21.96 5.06,21.94 5.04,21.93 5.02,21.93 4.33,21.93 4.33,21.93 4.33,21.68 4.75,21.68 4.78,21.68 4.8,21.68 4.83,21.67 4.85,21.66 4.87,21.65 4.88,21.63 4.9,21.61 4.91,21.59 4.91,21.56 4.91,21.55 4.91,21.52 4.91,21.5 4.9,21.47 4.89,21.46 4.87,21.44 4.85,21.42 4.83,21.41 4.81,21.41 4.78,21.4 4.33,21.4 4.33,20.76 4.91,20.76
  pour Top (rank 3): 5.49,24.47 5.49,20.76 5.61,20.76 5.61,24.47
  pour Top (rank 3): 4.18,20.18 4.16,20.19 4.13,20.19 4.11,20.2 4.09,20.22 4.07,20.25 4.05,20.27 4.05,20.3 4.04,20.32 4.05,24.62 4.05,24.64 4.05,24.66 4.06,24.68 4.08,24.7 4.09,24.71 4.11,24.73 4.13,24.74 4.15,24.75 4.18,24.75 5.49,24.75 5.49,24.75 5.49,26.48 5.42,26.49 5.21,26.51 5.01,26.51 4.8,26.51 4.6,26.49 4.4,26.47 4.2,26.43 4,26.39 3.81,26.33 3.63,26.27 3.45,26.2 3.27,26.12 3.1,26.03 2.93,25.93 2.77,25.83 2.61,25.72 2.46,25.6 2.31,25.47 2.17,25.34 2.04,25.2 1.92,25.06 1.8,24.9 1.68,24.75 1.58,24.58 1.48,24.42 1.39,24.24 1.31,24.07 1.24,23.88 1.18,23.7 1.13,23.51 1.08,23.31 1.05,23.12 1.02,22.92 1.01,22.71 1,22.51 1.01,22.3 1.02,22.1 1.05,21.9 1.08,21.7 1.13,21.5 1.18,21.32 1.24,21.13 1.31,20.95 1.39,20.77 1.48,20.6 1.58,20.43 1.68,20.27 1.8,20.11 1.91,19.96 2.04,19.81 2.17,19.67 2.31,19.54 2.46,19.41 2.61,19.3 2.77,19.18 2.93,19.08 3.1,18.98 3.27,18.9 3.45,18.82 3.63,18.74 3.82,18.68 4,18.63 4.2,18.58 4.4,18.55 4.6,18.52 4.8,18.51 5.01,18.5 5.21,18.51 5.42,18.52 5.49,18.53 5.49,20.18
  pour Top (rank 3): 9.01,22.71 8.99,22.92 8.97,23.12 8.93,23.32 8.89,23.51 8.83,23.7 8.77,23.88 8.7,24.07 8.62,24.24 8.53,24.42 8.43,24.59 8.33,24.75 8.22,24.9 8.1,25.05 7.97,25.2 7.84,25.34 7.7,25.47 7.55,25.6 7.4,25.72 7.25,25.83 7.08,25.93 6.92,26.03 6.74,26.12 6.57,26.2 6.38,26.27 6.2,26.33 6.01,26.39 5.81,26.43 5.62,26.47 5.49,26.48 5.49,24.75 5.76,24.75 5.78,24.75 5.8,24.74 5.82,24.73 5.83,24.72 5.85,24.71 5.86,24.69 5.87,24.68 5.88,24.66 5.89,24.64 5.89,24.62 5.89,20.31 5.89,20.29 5.88,20.27 5.87,20.25 5.86,20.23 5.85,20.22 5.83,20.21 5.81,20.2 5.79,20.19 5.77,20.18 5.76,20.18 5.49,20.18 5.49,20.18 5.49,18.53 5.62,18.55 5.81,18.58 6.01,18.63 6.2,18.68 6.38,18.74 6.57,18.81 6.74,18.9 6.92,18.98 7.08,19.08 7.25,19.18 7.4,19.3 7.56,19.42 7.7,19.54 7.84,19.67 7.97,19.81 8.1,19.96 8.22,20.11 8.33,20.27 8.43,20.43 8.53,20.6 8.62,20.77 8.7,20.95 8.77,21.13 8.83,21.31 8.89,21.5 8.93,21.7 8.97,21.9 8.99,22.1 9.01,22.3 9.01,22.51
  pour Top (rank 3): 5.49,20.76 5.49,20.47 5.61,20.47 5.61,20.76
LCL-M  (via drill 0.3, 0.35)  (1 unrouted)
  Top 0.152: U4.6 75.14,103.4 77.15,101.39 86.79,101.39 87.44,102.05 J2.1 | R8.1 59.53,109.79 | 59.53,109.79 60.43,109.79 R9.2 | v59.53,108.25 59.53,109.79
  Bottom 0.152: v59.53,108.25 63.87,103.79 86.09,103.79 86.97,102.9 v87.45,102.9
LCL-M1  (via drill 0.3, 0.35)  (1 unrouted)
  Top 0.152: U2.6 75.14,73.4 77.15,71.39 86.79,71.39 87.44,72.05 J4.1 | R17.1 59.53,79.79 | 59.53,79.79 60.43,79.79 R18.2 | v59.53,78.25 59.53,79.79
  Bottom 0.152: v59.53,78.25 63.87,73.79 86.09,73.79 86.97,72.9 v87.45,72.9
LCL-M2  (via drill 0.3, 0.35)  (1 unrouted)
  Top 0.152: U6.6 75.14,43.4 77.15,41.39 86.79,41.39 87.44,42.05 J6.1 | R26.1 59.53,49.79 | 59.53,49.79 60.43,49.79 R27.2 | v59.53,48.26 59.53,49.79
  Bottom 0.152: v59.53,48.26 63.87,43.79 86.09,43.79 86.97,42.9 v87.45,42.9
LCL-M3  (via drill 0.3, 0.35)  (1 unrouted)
  Top 0.152: U8.6 75.14,13.4 77.15,11.39 86.79,11.39 87.44,12.04 J8.1 | R35.1 59.53,19.79 | 59.53,19.79 60.43,19.79 R36.2 | v59.53,18.26 59.53,19.79
  Bottom 0.152: v59.53,18.26 63.87,13.79 86.09,13.79 86.97,12.9 v87.45,12.9
LCL-P  (via drill 0.3, 0.35)  (1 unrouted)
  Top 0.152: U4.7 75.07,103.9 77.27,101.69 85.5,101.69 86.2,102.4 86.2,104.97 J2.2 | R7.1 56,109.75 | 56,109.75 56.8,109.75 R8.2 | v55.97,108.25 55.97,109.72 56,109.75
  Bottom 0.152: v86.15,102.9 80.67,102.9 80.09,103.48 60.75,103.48 v55.97,108.25
LCL-P1  (via drill 0.3, 0.35)  (1 unrouted)
  Top 0.152: U2.7 75.07,73.9 77.27,71.69 85.5,71.69 86.2,72.4 86.2,74.97 J4.2 | R16.1 56,79.75 | 56,79.75 56.8,79.75 R17.2 | v55.97,78.25 55.97,79.72 56,79.75
  Bottom 0.152: v86.15,72.9 80.67,72.9 80.09,73.48 60.75,73.48 v55.97,78.25
LCL-P2  (via drill 0.3, 0.35)  (1 unrouted)
  Top 0.152: U6.7 75.07,43.9 77.27,41.7 85.5,41.7 86.2,42.4 86.2,44.98 J6.2 | R25.1 56,49.75 | 56,49.75 56.8,49.75 R26.2 | v55.97,48.26 55.97,49.72 56,49.75
  Bottom 0.152: v86.15,42.9 80.67,42.9 80.09,43.48 60.75,43.48 v55.97,48.26
LCL-P3  (via drill 0.3, 0.35)  (1 unrouted)
  Top 0.152: U8.7 75.07,13.9 77.27,11.7 85.5,11.7 86.2,12.4 86.2,14.97 J8.2 | R34.1 56,19.75 | 56,19.75 56.8,19.75 R35.2 | v55.97,18.26 55.97,19.72 56,19.75
  Bottom 0.152: v86.15,12.9 80.67,12.9 80.09,13.48 60.75,13.48 v55.97,18.26
LDA-M  (via drill 0.3, 0.35)  (1 unrouted)
  Top 0.152: J2.8 78.58,104.97 78.5,104.9 U4.9 | R5.1 49.24,109.89 | 49.24,109.89 50.02,109.89 R6.2 | v49.24,108.25 49.24,109.89
  Bottom 0.152: v78.55,102.9 54.6,102.9 v49.24,108.25
LDA-M1  (via drill 0.3, 0.35)  (1 unrouted)
  Top 0.152: J4.8 78.58,74.97 78.5,74.9 U2.9 | R14.1 49.24,79.89 | 49.24,79.89 50.02,79.89 R15.2 | v49.24,78.25 49.24,79.89
  Bottom 0.152: v78.55,72.9 54.6,72.9 v49.24,78.25
LDA-M2  (via drill 0.3, 0.35)  (1 unrouted)
  Top 0.152: J6.8 78.58,44.98 78.5,44.9 U6.9 | R23.1 49.24,49.9 | 49.24,49.9 50.02,49.9 R24.2 | v49.24,48.26 49.24,49.9
  Bottom 0.152: v78.55,42.9 54.6,42.9 v49.24,48.26
LDA-M3  (via drill 0.3, 0.35)  (1 unrouted)
  Top 0.152: J8.8 78.58,14.97 78.5,14.9 U8.9 | R32.1 49.24,19.89 | 49.24,19.89 50.02,19.89 R33.2 | v49.24,18.26 49.24,19.89
  Bottom 0.152: v78.55,12.9 54.6,12.9 v49.24,18.26
LDA-P  (via drill 0.3, 0.35)  (1 unrouted)
  Top 0.152: J2.7 79.85,104.97 79.85,102.45 79.4,102 77.4,102 75,104.4 U4.8 | R4.1 45.69,109.95 | 45.69,109.95 46.55,109.95 R5.2 | v45.69,108.25 45.69,109.95
  Bottom 0.152: v79.85,102.9 79.37,102.9 78.79,102.32 51.75,102.32 v45.69,108.25
LDA-P1  (via drill 0.3, 0.35)  (1 unrouted)
  Top 0.152: J4.7 79.85,74.97 79.85,72.45 79.4,72 77.4,72 75,74.4 U2.8 | R13.1 45.69,79.95 | 45.69,79.95 46.55,79.95 R14.2 | v45.69,78.25 45.69,79.95
  Bottom 0.152: v79.85,72.9 79.37,72.9 78.79,72.32 51.75,72.32 v45.69,78.25
LDA-P2  (via drill 0.3, 0.35)  (1 unrouted)
  Top 0.152: J6.7 79.85,44.98 79.85,42.45 79.4,42 77.4,42 75,44.4 U6.8 | R22.1 45.69,49.95 | 45.69,49.95 46.55,49.95 R23.2 | v45.69,48.26 45.69,49.95
  Bottom 0.152: v79.85,42.9 79.37,42.9 78.79,42.32 51.75,42.32 v45.69,48.26
LDA-P3  (via drill 0.3, 0.35)  (1 unrouted)
  Top 0.152: J8.7 79.85,14.97 79.85,12.45 79.4,12 77.4,12 75,14.4 U8.8 | R31.1 45.69,19.95 | 45.69,19.95 46.55,19.95 R32.2 | v45.69,18.26 45.69,19.95
  Bottom 0.152: v79.85,12.9 79.37,12.9 78.79,12.32 51.75,12.32 v45.69,18.26
N$1  (via drill 4.2 pad 6)
  other vias: 68.5,112.5
N$2  (via drill 4.2 pad 6)
  other vias: 68.5,82.5
N$3
  Top 0.152: C4.1 29.81,88.97 U$1.4
N$4  (via drill 4.2 pad 6)
  other vias: 68.5,52.5
N$5
  Top 0.152: C12.1 29.81,58.97 U$2.4
N$6
  Top 0.152: C8.1 29.81,118.97 U$4.4
N$7  (via drill 4.2 pad 6)
  other vias: 68.5,22.5
N$8
  Top 0.152: C17.1 29.81,28.97 U$3.4
SCL
  Top 0.152: J1.P$2 22.28,106.82 22.28,102.42 | 22.28,102.42 22.28,101.42 22.6,101.1 22.6,101.09 24,101.09 24.36,101.46 U3.6 24.36,103.7 24.61,103.94 29.82,103.94 U4.4 | R3.2 22.26,102.4 22.28,102.42
SCL1
  Top 0.152: J3.P$2 22.28,76.82 22.28,72.42 | 22.28,72.42 22.28,71.42 22.6,71.1 22.6,71.09 24,71.09 24.36,71.46 U1.6 24.36,73.7 24.61,73.94 29.82,73.94 U2.4 | R12.2 22.26,72.4 22.28,72.42
SCL2
  Top 0.152: J5.P$2 22.28,46.82 22.28,42.42 | 22.28,42.42 22.28,41.42 22.6,41.1 22.6,41.09 24,41.09 24.36,41.46 U5.6 24.36,43.7 24.61,43.94 29.82,43.94 U6.4 | R21.2 22.26,42.4 22.28,42.42
SCL3
  Top 0.152: J7.P$2 22.28,16.82 22.28,12.42 | 22.28,12.42 22.28,11.42 22.6,11.1 22.6,11.09 24,11.09 24.36,11.46 U7.6 24.36,13.7 24.61,13.94 29.82,13.94 U8.4 | R30.2 22.26,12.4 22.28,12.42
SDA
  Top 0.152: R2.2 22.72,111.23 J1.P$3 22.58,109.06 22.58,106.46 23.02,106.02 23.02,102.6 U3.5 23.09,103.25 24.75,104.9 24.81,104.9 25,104.9 U4.2
SDA1
  Top 0.152: R11.2 22.72,81.23 J3.P$3 22.58,79.06 22.58,76.46 23.02,76.02 23.02,72.6 U1.5 23.09,73.25 24.75,74.9 24.81,74.9 25,74.9 U2.2
SDA2
  Top 0.152: R20.2 22.72,51.23 J5.P$3 22.58,49.06 22.58,46.46 23.02,46.02 23.02,42.6 U5.5 23.09,43.25 24.75,44.9 24.81,44.9 25,44.9 U6.2
SDA3
  Top 0.152: R29.2 22.72,21.23 J7.P$3 22.58,19.06 22.58,16.46 23.02,16.02 23.02,12.6 U7.5 23.09,13.25 24.75,14.9 24.81,14.9 25,14.9 U8.2
UNREG
  Top 0.406: J1.P$7 14.59,120.59 16,122 35.98,122 | U$4.1 32.23,117 35,117 36,118 36,121.98 35.98,122 | J2.3 85,105.09 85,110 73,122 35.98,122
UNREG1
  Top 0.406: J3.P$7 14.59,90.59 16,92 35.98,92 | U$1.1 32.23,87 35,87 36,88 36,91.98 35.98,92 | J4.3 85,75.09 85,80 73,92 35.98,92
UNREG2
  Top 0.406: J5.P$7 14.59,60.59 16,62 35.98,62 | U$2.1 32.23,57 35,57 36,58 36,61.98 35.98,62 | J6.3 85,45.09 85,50 73,62 35.98,62
UNREG3
  Top 0.406: J7.P$7 14.59,30.59 16,32 35.98,32 | U$3.1 32.23,27 35,27 36,28 36,31.98 35.98,32 | J8.3 85,15.1 85,20 73,32 35.98,32

## Text on the board
bPlace: THIS / SIDE / DOWN | THIS / SIDE / DOWN | THIS / SIDE / DOWN | THIS / SIDE / DOWN
tNames: C8 | R1 | C9 | C7 | R4 | R6 | R7 | R9 | R2 | R5 | R8 | U4 | C2 | R3 | C1 | C8 | R1 | C9 | C7 | R4 | R6 | R7 | R9 | R2 | R5 | R8 | U4 | C2 | R3 | C1 | C8 | R1 | C9 | C7 | R4 | R6 | R7 | R9 | R2 | R5 | R8 | U4 | C2 | R3 | C1 | C8 | R1 | C9 | C7 | R4 | R6 | R7 | R9 | R2 | R5 | R8 | U4 | C2 | R3 | C1